# EAGLE board part D (EAGLE 9.6.2)

Size 41 x 75.5 mm. Coordinates in mm from the lower left corner, seen from the top.
Outline: 0,73.5 arc-90 2,75.5
Outline: 0,2 arc90 2,0
Outline: 39,75.5 arc-90 41,73.5
Outline: 41,2 arc-90 39,0
Outline: 0,2 0,73.5
Outline: 0,73.5 arc-90 2,75.5
Outline: 2,75.5 39,75.5
Outline: 0,2 arc90 2,0
Outline: 39,75.5 arc-90 41,73.5
Outline: 41,73.5 41,2
Outline: 41,2 arc-90 39,0
Outline: 39,0 2,0
Copper layers (1*16): Top 0.035mm / dielectric 1mm / Bottom 0.035mm
Design rules "default *": minimum track width 6mil, minimum drill 0.35mm, track to track 6mil, track to pad 6mil, pad to pad 6mil, via to via 6mil, smd to smd 6mil, copper to edge 40mil, drill to drill 6mil, minimum pad ring 10mil, minimum via ring 8mil, stop-mask expansion 4mil, vias tented up to drill 0mil, thermal gap 10mil
Holes 2 mm at 2,73.5 39,73.5 39,2 2,2

## Placement (x,y rotation side)
E$1  [ZUBAX_40X18]  12.5,16.5 90 bottom

## Library data of the parts
E$1 = logo